# EAGLE board fishnet-0.1 (EAGLE 7.3.0)

Size 76 x 18.06 mm. Coordinates in mm from the lower left corner, seen from the top.
Outline: 0,0 0,18 76,18.06 76,0.06 0,0
Copper layers (1*16): Top 0.0356mm / dielectric 1.5011mm / Bottom 0.0356mm
Design rules "LaenPCBOrder": minimum track width 6mil, minimum drill 13mil, track to track 6mil, track to pad 6mil, pad to pad 6mil, via to via 6mil, smd to smd 6mil, copper to edge 15mil, drill to drill 6mil, minimum pad ring 7mil, minimum via ring 7mil, stop-mask expansion 3mil, vias tented up to drill 0mil, thermal gap 10mil
Net classes: 0 default: width 0.178 mm, clearance 0.178 mm

## Footprints (pad centres in the part's own frame; a part is rotated, then mirrored left to right if it is on the bottom)
0603-CAP = smd 1.1 x 1: 1 -0.85,0; 2 0.85,0
JST-PH-2-SMT-RA = smd 1 x 4.6: 1 1,-3.7; 2 -1,-3.7 | smd 1.6 x 3.4: NC1 -3.4,1.5; NC2 3.4,1.5
TQFP32-08 = smd 1.27 x 0.559: 1 -4.293,2.8; 2 -4.293,2; 3 -4.293,1.2; 4 -4.293,0.4; 5 -4.293,-0.4; 6 -4.293,-1.2; 7 -4.293,-2; 8 -4.293,-2.8; 17 4.293,-2.8; 18 4.293,-2; 19 4.293,-1.2; 20 4.293,-0.4; 21 4.293,0.4; 22 4.293,1.2; 23 4.293,2; 24 4.293,2.8 | smd 0.559 x 1.27: 9 -2.8,-4.293; 10 -2,-4.293; 11 -1.2,-4.293; 12 -0.4,-4.293; 13 0.4,-4.293; 14 1.2,-4.293; 15 2,-4.293; 16 2.8,-4.293; 25 2.8,4.293; 26 2,4.293; 27 1.2,4.293; 28 0.4,4.293; 29 -0.4,4.293; 30 -1.2,4.293; 31 -2,4.293; 32 -2.8,4.293
SOT89 = smd 0.58 x 1.2: 1 -1.5,-1.8; 2 0,-1.8; 3 1.5,-1.8 | smd 2 x 2: 4 0,1.3
2X03 = drill 1.016 octagon: 1 -2.54,-1.27; 2 -2.54,1.27; 3 0,-1.27; 4 0,1.27; 5 2.54,-1.27; 6 2.54,1.27
AYZ0202 = smd 1 x 1.15: 1 -2.5,2.825; 2 0,2.825; 3 2.5,2.825; 4 -2.5,-2.825; 5 0,-2.825; 6 2.5,-2.825 | hole 0.85: 1.5,0; -1.5,0
1X06 = drill 1.016 long: 1 -6.35,0; 2 -3.81,0; 3 -1.27,0; 4 1.27,0; 5 3.81,0; 6 6.35,0
RGBLED5050 = smd 2 x 1.1: 1 -2,1.7; 2 -2,0; 3 -2,-1.7; 4 2,-1.7; 5 2,0; 6 2,1.7
0603-NO = smd 1.1 x 1: 1 -0.85,0; 2 0.85,0
EXB38V = smd 0.6 x 0.8: 1 -1.275,-0.75; 4 1.275,-0.75; 5 1.275,0.75; 8 -1.275,0.75 | smd 0.5 x 0.8: 2 -0.4,-0.75; 3 0.4,-0.75; 6 0.4,0.75; 7 -0.4,0.75
MA04-1 = drill 1.016 long: 1 -3.81,0; 2 -1.27,0; 3 1.27,0; 4 3.81,0
DM3D = smd 0.7 x 1.75: CD/DAT3 8.15,0.45; CLK 4.85,0.45; CMD 7.05,0.45; DAT0 2.65,0.45; DAT1 1.6,0.45; DAT2 9.25,0.45 | smd 0.8 x 1.5: GND1 0.05,8.15 | smd 0.8 x 1.4: GND2 11.95,8.8 | smd 1.4 x 1.5: GND3 11.65,0.55 | smd 1.3 x 1.5: GND4 0.35,0.55 | smd 1 x 1.55: SW_A 11.6,11.25 | smd 1.4 x 1: SW_B 0.35,9.65 | smd 0.7 x 2.032: VDD 5.95,0.45; VSS 3.75,0.45
RESONATOR-SMD = smd 0.7 x 1.7: 1 -1.2,0; 2 0,0; 3 1.2,0

## Placement (x,y rotation side)
C5  10uF  [0603-CAP]  35.08,61.07 0 top  (outside the outline)
C6  10uF  [0603-CAP]  35.02,58.79 180 top  (outside the outline)
C10  0.1uF  [0603-CAP]  55.98,46.77 0 top  (outside the outline)
C11  0.1uF  [0603-CAP]  55.27,50.31 90 top  (outside the outline)
CN1  [JST-PH-2-SMT-RA]  18.6,42.29 270 bottom  (outside the outline)
IC1  ATMEGA328P  [TQFP32-08]  48.13,46.58 45 top  (outside the outline)
IC4  MCP1700-33  [SOT89]  30.38,60.37 180 top  (outside the outline)
ISP  [2X03]  25.75,22.86 180 top  (outside the outline)
J1  AYZ0202  [AYZ0202]  33.72,33.46 270 top  (outside the outline)
JP2  [1X06]  2.12,8.99 90 top
LED  RGBLED5050  [RGBLED5050]  4.17,32.87 0 top  (outside the outline)
R3  10K  [0603-NO]  46.67,53.51 0 top  (outside the outline)
R7  50K  [0603-NO]  -1.76,62.04 270 top  (outside the outline)
R8  50K  [0603-NO]  -0.36,62.04 90 top  (outside the outline)
R9  10K  [0603-NO]  67.49,44.48 180 top  (outside the outline)
R10  10K  [0603-NO]  67.5,43.07 180 top  (outside the outline)
RN1  [EXB38V]  4.6,26.95 0 top  (outside the outline)
SV1  [MA04-1]  57.66,30.18 90 top  (outside the outline)
U$1  MICROSD-HRS_DM3D  [DM3D]  14.8,59.35 180 top  (outside the outline)
X3  16 MHz  [RESONATOR-SMD]  42.11,51.16 225 top  (outside the outline)

## Library data of the parts
C5 C6 C10 C11 X3 = SparkFun
CN1 IC4 LED = adafruit
IC1 = atmel; MPN: ATMEGA8-16AU; OC_FARNELL: 9171371; OC_NEWARK: 73M8863
ISP JP2 = pinhead
J1 = SparkFunNew
R3 R7-R10 = microbuilder
RN1 = resistor-dil; OC_FARNELL: unknown; OC_NEWARK: unknown
SV1 = con-lstb; OC_FARNELL: unknown; OC_NEWARK: unknown
U$1 = hrs_DM3D-SF

## Nets
A0: IC1.23
A1: IC1.24
A2: IC1.25
A3: IC1.26
AREF: C10.1 IC1.20
D2: IC1.32
D3: IC1.1
D4: IC1.2 RN1.4
D5: IC1.9 RN1.2
D6: IC1.10 RN1.3
D7: IC1.11 U$1.CD/DAT3
D8: IC1.12
D9: IC1.13
D10: IC1.14
GND: C5.2 C6.2 C10.2 C11.1 CN1.2 IC1.3 IC1.5 IC1.21 IC4.1 ISP.6 JP2.1 LED.4 LED.5 LED.6 SV1.2 U$1.GND1 U$1.GND2 U$1.GND3 U$1.GND4 U$1.SW_A U$1.SW_B U$1.VSS X3.2
MISO: IC1.16 ISP.1 U$1.DAT0
MOSI: IC1.15 ISP.4 U$1.CMD
N$1: LED.3 RN1.5
N$2: IC1.7 X3.1
N$3: IC1.8 X3.3
N$8: LED.1 RN1.7
N$9: LED.2 RN1.6
N$16: R7.2 U$1.DAT1
N$18: R8.1 U$1.DAT2
RESET: IC1.29 ISP.5 R3.1
RST: JP2.6
RXD: IC1.30 JP2.4
SCK: IC1.17 ISP.3 U$1.CLK
SCL: IC1.28 R9.1 SV1.3
SDA: IC1.27 R10.1 SV1.4
TXD: IC1.31 JP2.5
VBAT [vcc]: CN1.1 J1.2
VBUS [vcc]: ISP.2 JP2.3
VCC: C6.1 C11.2 IC1.4 IC1.6 IC1.18 IC4.3 R3.2 R7.1 R8.2 R9.2 R10.2 SV1.1 U$1.VDD
VDD: C5.1 IC4.2 J1.1

## Tracks (layer width: path | path; a pad name or v marks a point on that pad's centre or on a via)
AREF  (1 unrouted)
D4  (1 unrouted)
D5  (1 unrouted)
D6  (1 unrouted)
D7  (1 unrouted)
GND  (22 unrouted)
MISO  (2 unrouted)
MOSI  (2 unrouted)
N$1  (1 unrouted)
N$2  (1 unrouted)
N$3  (1 unrouted)
N$8  (1 unrouted)
N$9  (1 unrouted)
N$16  (1 unrouted)
N$18  (1 unrouted)
RESET  (2 unrouted)
RXD  (1 unrouted)
SCK  (2 unrouted)
SCL  (2 unrouted)
SDA  (2 unrouted)
TXD  (1 unrouted)
VBAT  (1 unrouted)
VBUS  (1 unrouted)
VCC  (12 unrouted)
VDD  (2 unrouted)

## Text on the board
tPlace: sd card | voltage regulator | 328p | jst | i2c pullup | pwr switch | RESET | SCK | MISO | i2c breakout | isp | GND | MOSI | VBUS | DTR | TX | RX | VBUS | GND
bPlace: VBAT | A0 | TX | SCL | RX | SCK | D2 | SDA | MOSI | D3 | MISO | 3V3 | D10 | GND | A1 | A2 | D4 | D5